# EAGLE board Instructables 36+12 (EAGLE 9.0.1)
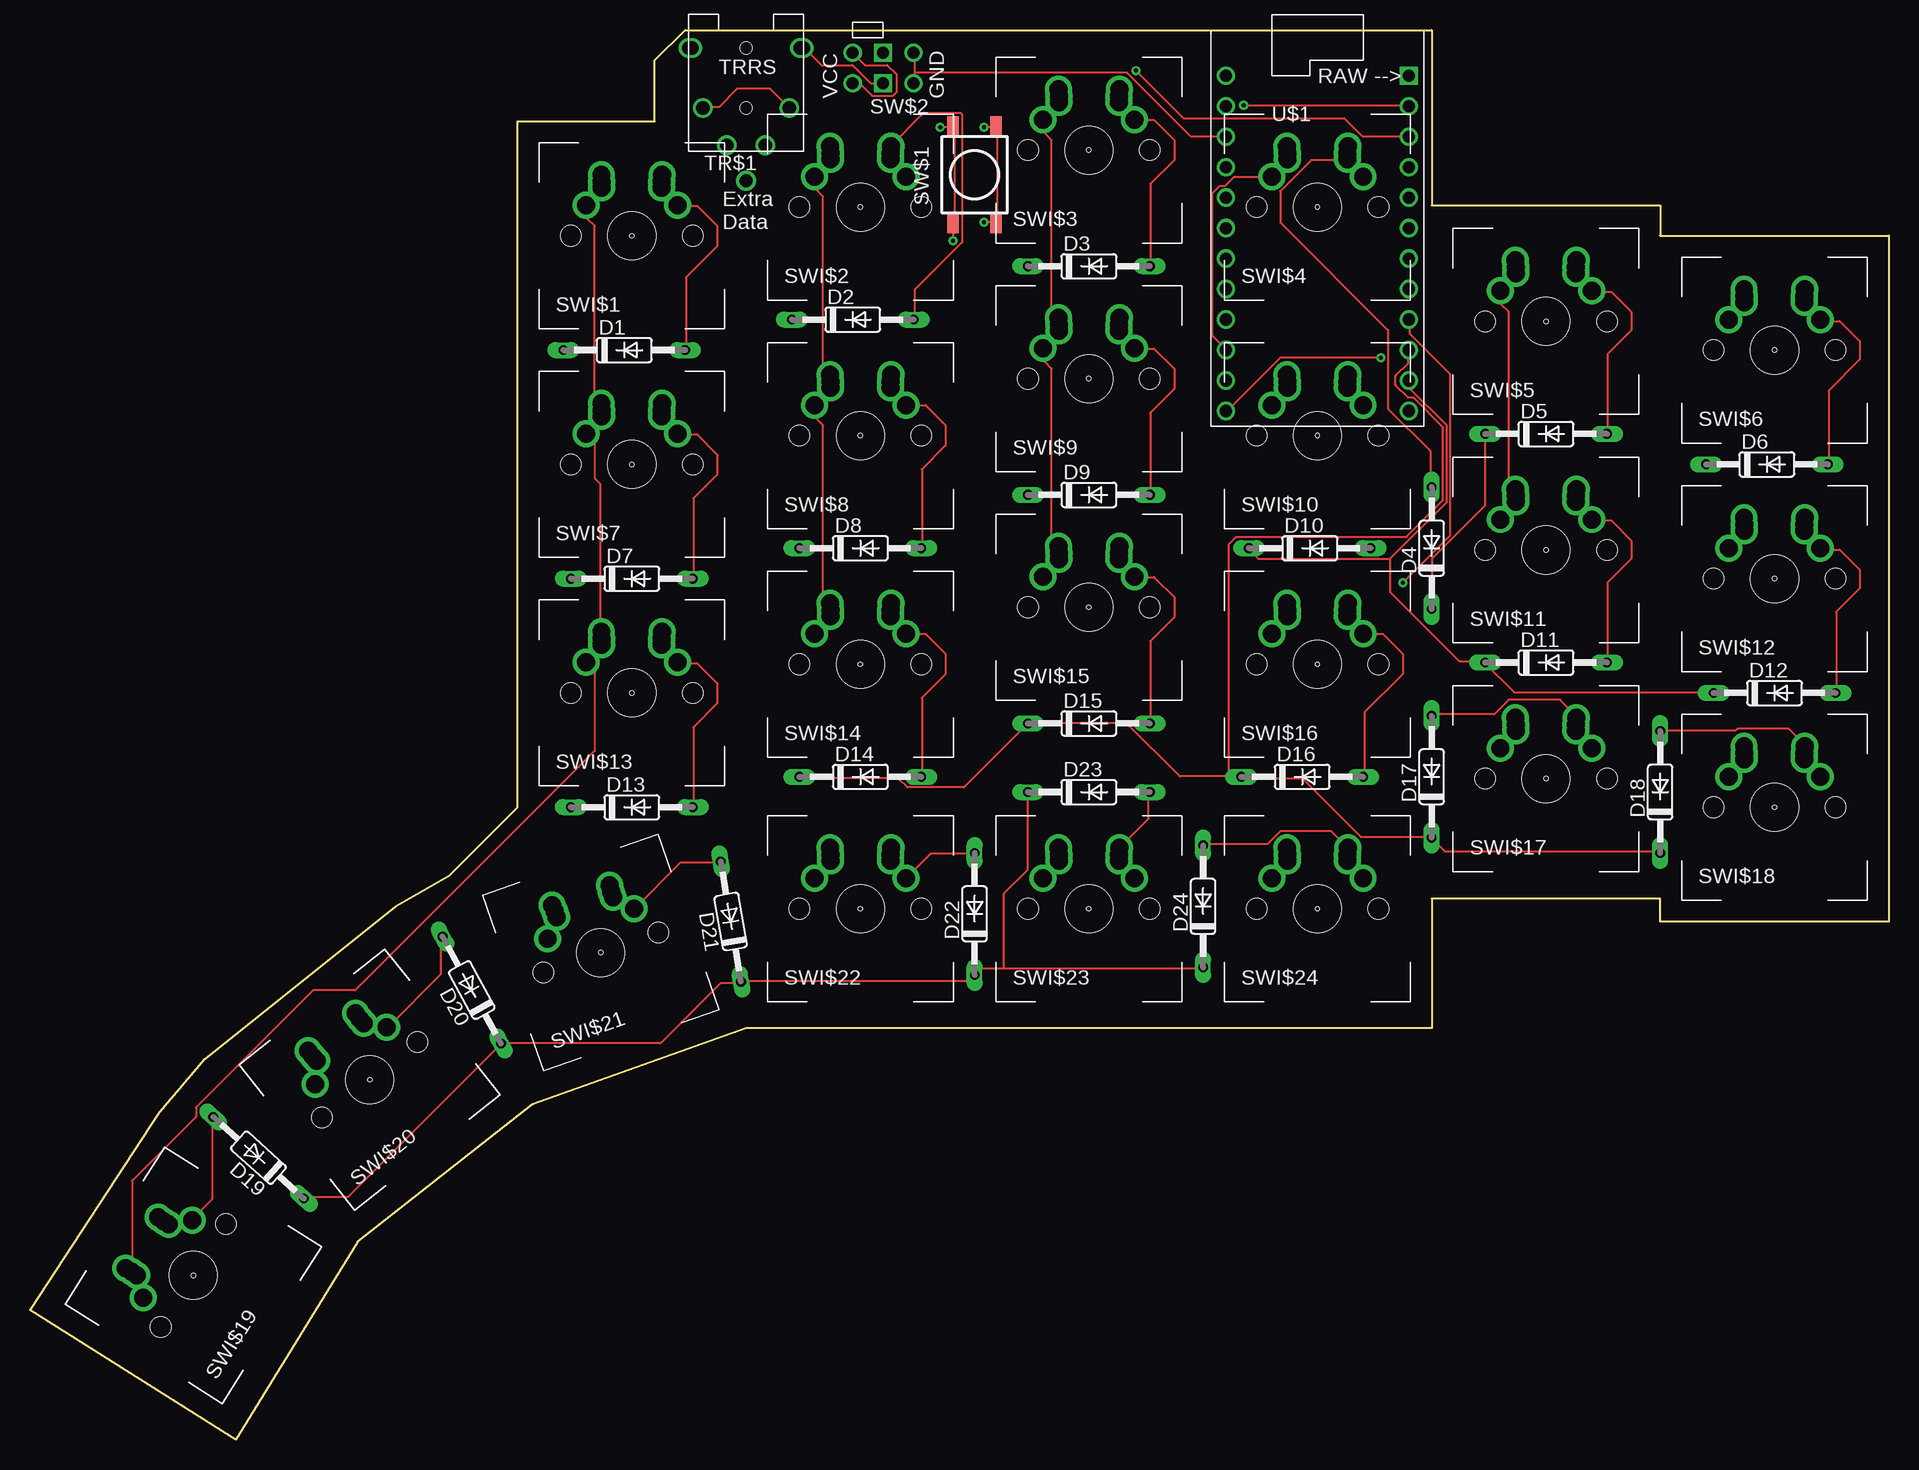
[diagram p0: board, top side]
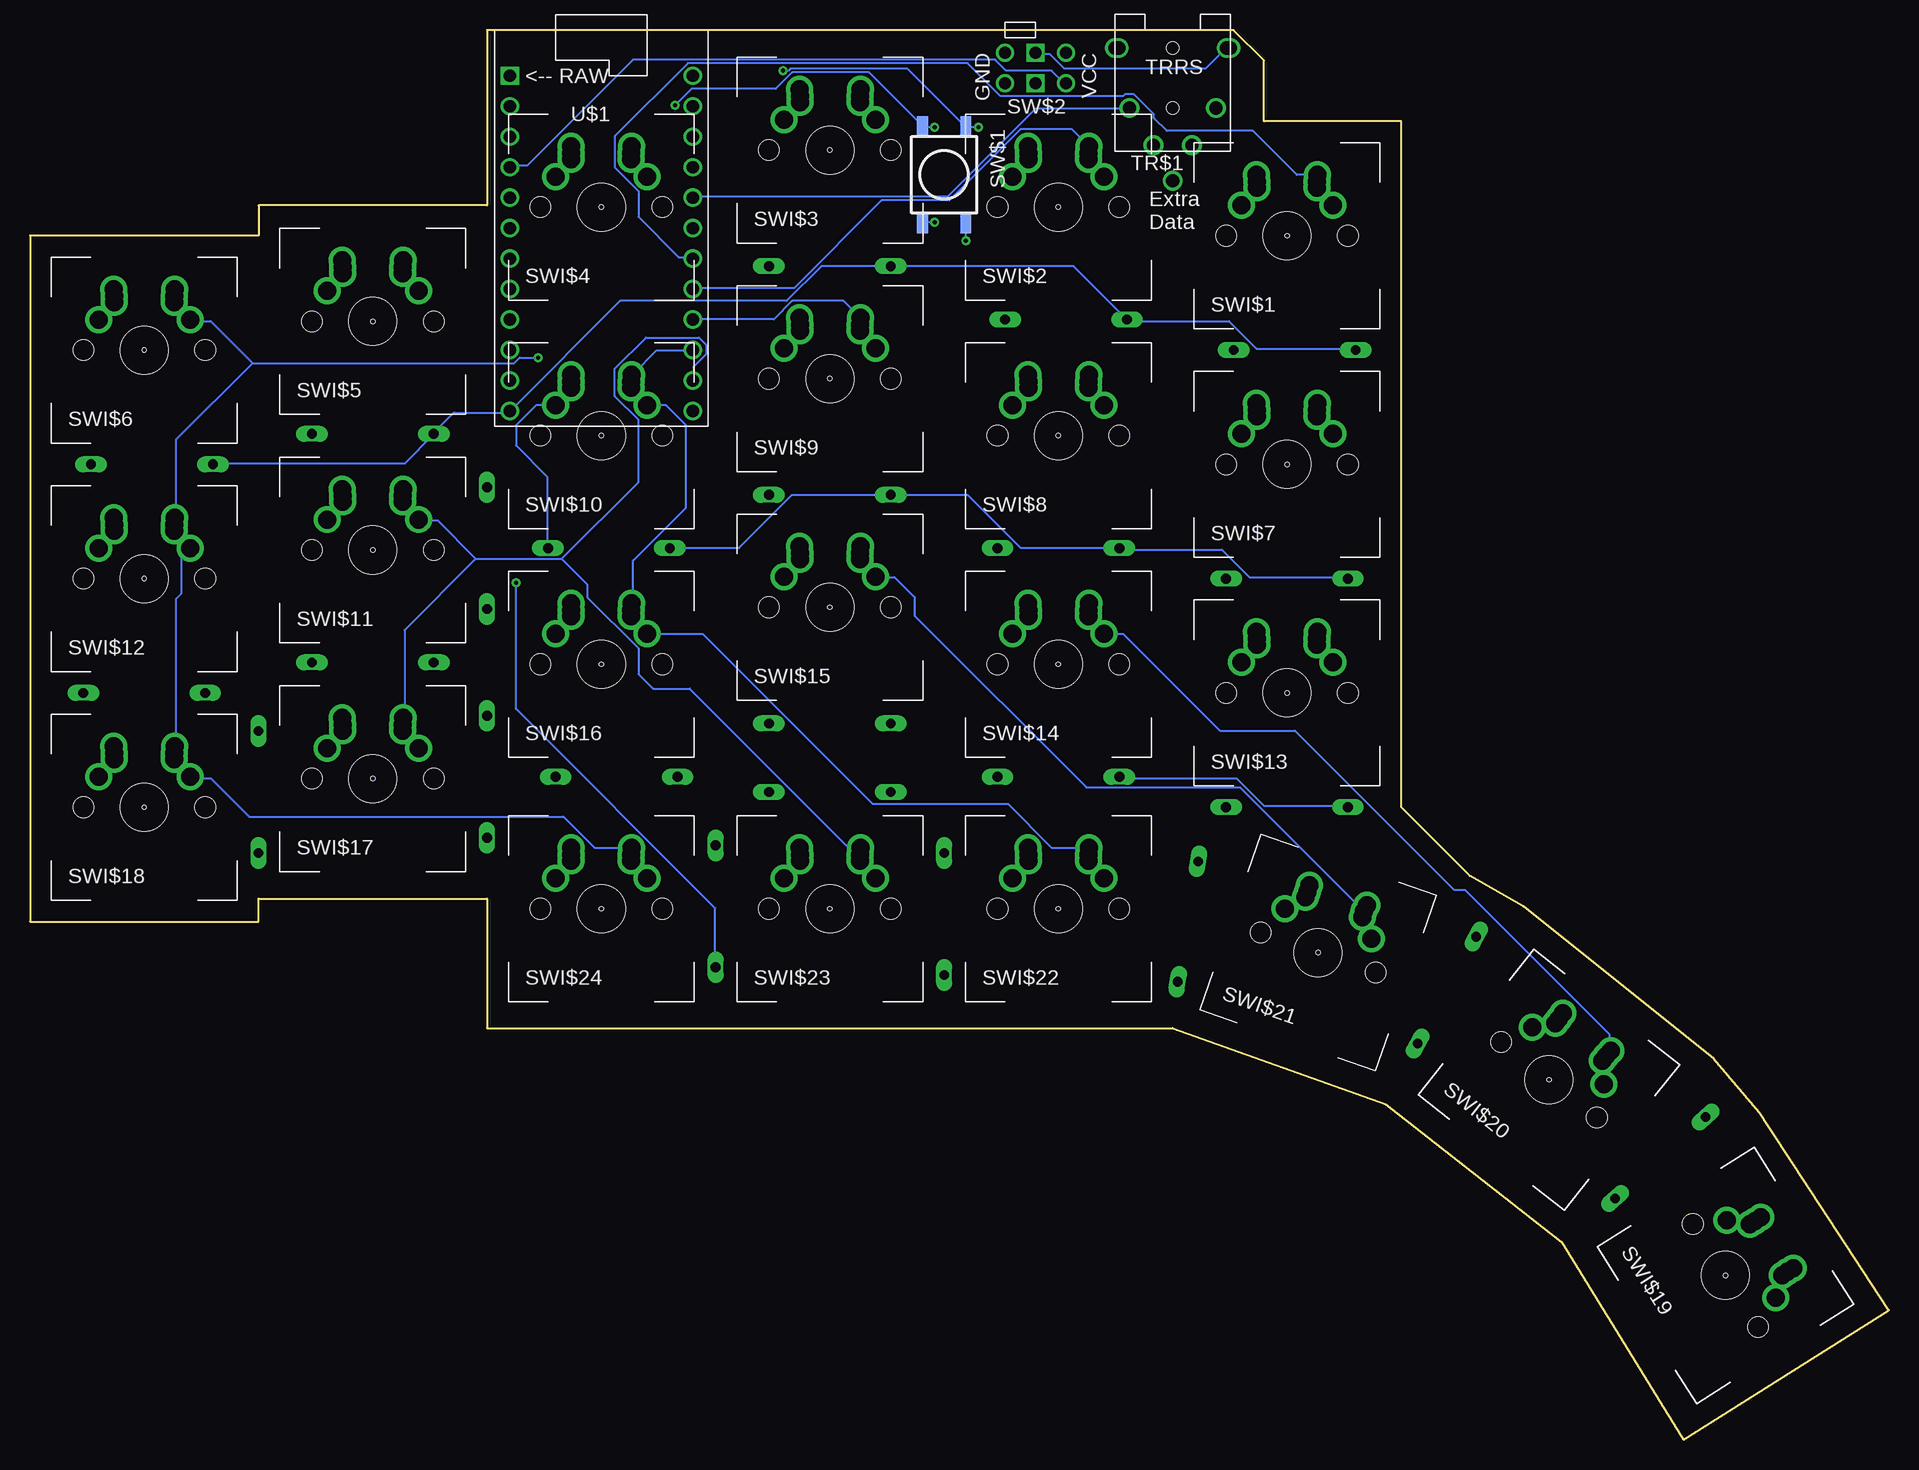
[diagram p1: board, bottom side, seen from below]

Size 154.94 x 117.48 mm. Coordinates in mm from the lower left corner, seen from the top.
Outline: 0,10.79 10.79,27.3 14.61,31.75 30.48,44.45 34.93,46.99 40.64,52.7 40.64,109.86 52.07,109.86 52.07,114.94 54.61,117.48 116.84,117.48 116.84,102.87 135.89,102.87 135.89,100.33 154.94,100.33 154.94,43.18 135.89,43.18 135.89,45.08 116.84,45.08 116.84,34.29 59.69,34.29 41.91,27.94 27.3,16.51 17.14,0 0,10.79
Copper layers (1*16): Top 0.035mm / dielectric 1.5mm / Bottom 0.035mm
Design rules "default": minimum track width 6mil, minimum drill 0.35mm, track to track 6mil, track to pad 6mil, pad to pad 6mil, via to via 6mil, smd to smd 6mil, copper to edge 40mil, drill to drill 6mil, minimum pad ring 10mil, minimum via ring 8mil, stop-mask expansion 4mil, vias tented up to drill 0mil, thermal gap 10mil

## Footprints (pad centres in the part's own frame; a part is rotated, then mirrored left to right if it is on the bottom)
DO35-10 = drill 0.813 long: A 5.08,0; C -5.08,0
FLATSWT = smd 1.778 x 0.914: P$1 -4,-1.8; P$2 4,-1.8; P$3 -4,1.8; P$4 4,1.8 | smd 1.778 x 0.914 bottom: P$5 -4,-1.8; P$6 4,-1.8; P$7 -4,1.8; P$8 4,1.8
TRANSFER = drill 1: GND1 0,-5.08; GND2 2.54,-5.08; VCC1 0,0; VCC2 2.54,0 | drill 1 square: IN1 0,-2.54; IN4 2.54,-2.54
DOUBLED_MX/ALPS = drill 1.5: LAL -2.5,4; LAR -2.5,4.5; RAL 2.5,4; RAR 2.5,4.5 | drill 1.499: LCL -3.81,2.54; LCR -2.54,5.08; RCL 3.81,2.54; RCR 2.54,5.08 | hole 0.35: 0,0 | hole 3.988: 0,0 | hole 1.702: -5.08,0; 5.08,0
TRRSJACK = drill 1.1: 1B 4.5,-1.5; 1T 4.8,-1.5; 2B 3.6,-6.5; 2T -3.6,-6.5; 3B -1.6,-9.6; 3T 1.6,-9.6; 4B -4.8,-1.5; 4T -4.5,-1.5; EXTRA_DATA 0,-12.57 | hole 1: 0,-1.5; 0,-6.5
PROMICRO_UNDER = drill 1.016: P$1 -7.62,0; P$2 -7.62,-2.54; P$3 -7.62,-5.08; P$4 -7.62,-7.62; P$5 -7.62,-10.16; P$6 -7.62,-12.7; P$7 -7.62,-15.24; P$8 -7.62,-17.78; P$9 -7.62,-20.32; P$10 -7.62,-22.86; P$11 -7.62,-25.4; P$12 -7.62,-27.94; P$13 7.62,-27.94; P$14 7.62,-25.4; P$15 7.62,-22.86; P$16 7.62,-20.32; P$17 7.62,-17.78; P$18 7.62,-15.24; P$19 7.62,-12.7; P$20 7.62,-10.16; P$21 7.62,-7.62; P$22 7.62,-5.08; P$23 7.62,-2.54 | drill 1.016 square: P$24 7.62,0

## Placement (x,y rotation side)
D1  1N4148DO35-10  [DO35-10]  49.53,90.81 0 top
D2  1N4148DO35-10  [DO35-10]  68.58,93.34 0 top
D3  1N4148DO35-10  [DO35-10]  88.27,97.79 0 top
D4  1N4148DO35-10  [DO35-10]  116.84,74.3 90 top
D5  1N4148DO35-10  [DO35-10]  126.36,83.82 0 top
D6  1N4148DO35-10  [DO35-10]  144.78,81.28 0 top
D7  1N4148DO35-10  [DO35-10]  50.16,71.76 0 top
D8  1N4148DO35-10  [DO35-10]  69.21,74.3 0 top
D9  1N4148DO35-10  [DO35-10]  88.27,78.74 0 top
D10  1N4148DO35-10  [DO35-10]  106.68,74.3 0 top
D11  1N4148DO35-10  [DO35-10]  126.36,64.77 0 top
D12  1N4148DO35-10  [DO35-10]  145.42,62.23 0 top
D13  1N4148DO35-10  [DO35-10]  50.16,52.7 0 top
D14  1N4148DO35-10  [DO35-10]  69.21,55.24 0 top
D15  1N4148DO35-10  [DO35-10]  88.27,59.69 0 top
D16  1N4148DO35-10  [DO35-10]  106.05,55.24 0 top
D17  1N4148DO35-10  [DO35-10]  116.84,55.24 90 top
D18  1N4148DO35-10  [DO35-10]  135.89,53.97 90 top
D19  1N4148DO35-10  [DO35-10]  19.05,23.5 138 top
D20  1N4148DO35-10  [DO35-10]  36.83,37.46 118.7 top
D21  1N4148DO35-10  [DO35-10]  58.42,43.18 99.6 top
D22  1N4148DO35-10  [DO35-10]  78.74,43.81 90 top
D23  1N4148DO35-10  [DO35-10]  88.27,53.97 0 top
D24  1N4148DO35-10  [DO35-10]  97.79,44.45 90 top
SW$1  RSTSWSMD  [FLATSWT]  78.74,105.41 90 top
SW$2  TRANSFERHOLEY  [TRANSFER]  68.58,113.03 90 top
SWI$1  MX/ALPSDOUBLESIDED  [DOUBLED_MX/ALPS]  50.16,100.33 0 top
SWI$2  MX/ALPSDOUBLESIDED  [DOUBLED_MX/ALPS]  69.21,102.72 0 top
SWI$3  MX/ALPSDOUBLESIDED  [DOUBLED_MX/ALPS]  88.27,107.47 0 top
SWI$4  MX/ALPSDOUBLESIDED  [DOUBLED_MX/ALPS]  107.31,102.72 0 top
SWI$5  MX/ALPSDOUBLESIDED  [DOUBLED_MX/ALPS]  126.36,93.19 0 top
SWI$6  MX/ALPSDOUBLESIDED  [DOUBLED_MX/ALPS]  145.42,90.81 0 top
SWI$7  MX/ALPSDOUBLESIDED  [DOUBLED_MX/ALPS]  50.16,81.28 0 top
SWI$8  MX/ALPSDOUBLESIDED  [DOUBLED_MX/ALPS]  69.21,83.67 0 top
SWI$9  MX/ALPSDOUBLESIDED  [DOUBLED_MX/ALPS]  88.27,88.42 0 top
SWI$10  MX/ALPSDOUBLESIDED  [DOUBLED_MX/ALPS]  107.31,83.67 0 top
SWI$11  MX/ALPSDOUBLESIDED  [DOUBLED_MX/ALPS]  126.36,74.14 0 top
SWI$12  MX/ALPSDOUBLESIDED  [DOUBLED_MX/ALPS]  145.42,71.76 0 top
SWI$13  MX/ALPSDOUBLESIDED  [DOUBLED_MX/ALPS]  50.16,62.23 0 top
SWI$14  MX/ALPSDOUBLESIDED  [DOUBLED_MX/ALPS]  69.21,64.62 0 top
SWI$15  MX/ALPSDOUBLESIDED  [DOUBLED_MX/ALPS]  88.27,69.37 0 top
SWI$16  MX/ALPSDOUBLESIDED  [DOUBLED_MX/ALPS]  107.31,64.62 0 top
SWI$17  MX/ALPSDOUBLESIDED  [DOUBLED_MX/ALPS]  126.36,55.09 0 top
SWI$18  MX/ALPSDOUBLESIDED  [DOUBLED_MX/ALPS]  145.42,52.7 0 top
SWI$19  MX/ALPSDOUBLESIDED  [DOUBLED_MX/ALPS]  13.61,13.69 57.6 top
SWI$20  MX/ALPSDOUBLESIDED  [DOUBLED_MX/ALPS]  28.32,30 38.4 top
SWI$21  MX/ALPSDOUBLESIDED  [DOUBLED_MX/ALPS]  47.57,40.59 19.2 top
SWI$22  MX/ALPSDOUBLESIDED  [DOUBLED_MX/ALPS]  69.21,44.25 0 top
SWI$23  MX/ALPSDOUBLESIDED  [DOUBLED_MX/ALPS]  88.27,44.25 0 top
SWI$24  MX/ALPSDOUBLESIDED  [DOUBLED_MX/ALPS]  107.31,44.25 0 top
TR$1  TRRSJACK  [TRRSJACK]  59.69,117.48 0 top
U$1  PROMICROUNDER  [PROMICRO_UNDER]  107.31,113.67 0 top

## Library data of the parts
D1-D24 = diode
SW$1 SW$2 SWI$1-SWI$24 TR$1 U$1 = Keys

## Nets
N$1: D13.A SWI$13.RAL SWI$13.RAR SWI$13.RCL SWI$13.RCR
N$2: D1.A SWI$1.RAL SWI$1.RAR SWI$1.RCL SWI$1.RCR
N$3: D2.A SWI$2.RAL SWI$2.RAR SWI$2.RCL SWI$2.RCR
N$4: D3.A SWI$3.RAL SWI$3.RAR SWI$3.RCL SWI$3.RCR
N$5: D4.A SWI$4.RAL SWI$4.RAR SWI$4.RCL SWI$4.RCR
N$6: D5.A SWI$5.RAL SWI$5.RAR SWI$5.RCL SWI$5.RCR
N$7: D6.A SWI$6.RAL SWI$6.RAR SWI$6.RCL SWI$6.RCR
N$8: D7.A SWI$7.RAL SWI$7.RAR SWI$7.RCL SWI$7.RCR
N$9: D8.A SWI$8.RAL SWI$8.RAR SWI$8.RCL SWI$8.RCR
N$10: D9.A SWI$9.RAL SWI$9.RAR SWI$9.RCL SWI$9.RCR
N$11: D10.A SWI$10.RAL SWI$10.RAR SWI$10.RCL SWI$10.RCR
N$12: D11.A SWI$11.RAL SWI$11.RAR SWI$11.RCL SWI$11.RCR
N$13: D12.A SWI$12.RAL SWI$12.RAR SWI$12.RCL SWI$12.RCR
N$14: D14.A SWI$14.RAL SWI$14.RAR SWI$14.RCL SWI$14.RCR
N$15: D15.A SWI$15.RAL SWI$15.RAR SWI$15.RCL SWI$15.RCR
N$16: D16.A SWI$16.RAL SWI$16.RAR SWI$16.RCL SWI$16.RCR
N$17: D17.A SWI$17.RAL SWI$17.RAR SWI$17.RCL SWI$17.RCR
N$18: D18.A SWI$18.RAL SWI$18.RAR SWI$18.RCL SWI$18.RCR
N$19: D19.A SWI$19.RAL SWI$19.RAR SWI$19.RCL SWI$19.RCR
N$20: D20.A SWI$20.RAL SWI$20.RAR SWI$20.RCL SWI$20.RCR
N$21: D21.A SWI$21.RAL SWI$21.RAR SWI$21.RCL SWI$21.RCR
N$22: D22.A SWI$22.RAL SWI$22.RAR SWI$22.RCL SWI$22.RCR
N$23: D23.A SWI$23.RAL SWI$23.RAR SWI$23.RCL SWI$23.RCR
N$24: D24.A SWI$24.RAL SWI$24.RAR SWI$24.RCL SWI$24.RCR
N$25: D1.C D2.C D3.C D4.C D5.C D6.C U$1.P$13
N$26: D7.C D8.C D9.C D10.C D11.C D12.C U$1.P$14
N$27: D13.C D14.C D15.C D16.C D17.C D18.C U$1.P$15
N$28: D19.C D20.C D21.C D22.C D23.C D24.C U$1.P$16
N$29: SWI$1.LAL SWI$1.LAR SWI$1.LCL SWI$1.LCR SWI$7.LAL SWI$7.LAR SWI$7.LCL SWI$7.LCR SWI$13.LAL SWI$13.LAR SWI$13.LCL SWI$13.LCR SWI$19.LAL SWI$19.LAR SWI$19.LCL SWI$19.LCR U$1.P$7
N$30: SWI$2.LAL SWI$2.LAR SWI$2.LCL SWI$2.LCR SWI$8.LAL SWI$8.LAR SWI$8.LCL SWI$8.LCR SWI$14.LAL SWI$14.LAR SWI$14.LCL SWI$14.LCR SWI$20.LAL SWI$20.LAR SWI$20.LCL SWI$20.LCR U$1.P$8
N$31: SWI$3.LAL SWI$3.LAR SWI$3.LCL SWI$3.LCR SWI$9.LAL SWI$9.LAR SWI$9.LCL SWI$9.LCR SWI$15.LAL SWI$15.LAR SWI$15.LCL SWI$15.LCR SWI$21.LAL SWI$21.LAR SWI$21.LCL SWI$21.LCR U$1.P$9
N$32: SWI$4.LAL SWI$4.LAR SWI$4.LCL SWI$4.LCR SWI$10.LAL SWI$10.LAR SWI$10.LCL SWI$10.LCR SWI$16.LAL SWI$16.LAR SWI$16.LCL SWI$16.LCR SWI$22.LAL SWI$22.LAR SWI$22.LCL SWI$22.LCR U$1.P$10
N$33: SWI$5.LAL SWI$5.LAR SWI$5.LCL SWI$5.LCR SWI$11.LAL SWI$11.LAR SWI$11.LCL SWI$11.LCR SWI$17.LAL SWI$17.LAR SWI$17.LCL SWI$17.LCR SWI$23.LAL SWI$23.LAR SWI$23.LCL SWI$23.LCR U$1.P$11
N$34: SWI$6.LAL SWI$6.LAR SWI$6.LCL SWI$6.LCR SWI$12.LAL SWI$12.LAR SWI$12.LCL SWI$12.LCR SWI$18.LAL SWI$18.LAR SWI$18.LCL SWI$18.LCR SWI$24.LAL SWI$24.LAR SWI$24.LCL SWI$24.LCR U$1.P$12
N$35: SW$1.P$1 SW$1.P$2 SW$1.P$5 SW$1.P$6 U$1.P$23
N$36: SW$1.P$3 SW$1.P$4 SW$1.P$7 SW$1.P$8 U$1.P$22
N$37: SW$2.GND1 SW$2.GND2 U$1.P$3
N$38: SW$2.VCC1 SW$2.VCC2 U$1.P$21
N$39: SW$2.IN1 TR$1.1B TR$1.1T
N$40: SW$2.IN4 TR$1.4B TR$1.4T
N$41: TR$1.2B TR$1.2T U$1.P$5

## Tracks (layer width: path | path; a pad name or v marks a point on that pad's centre or on a via)
N$1
  Top 0.152: D13.A 55.3,52.83 55.3,59.38 57.28,61.37 57.28,63.04 55.6,64.72 54.08,64.72 SWI$13.RCL
N$2
  Top 0.152: D1.A 54.69,90.93 54.69,96.88 57.28,99.47 57.28,101.14 55.6,102.82 54.08,102.82 SWI$1.RCL
N$3
  Top 0.152: D2.A 73.74,93.37 73.74,95.81 77.7,99.77 77.7,110.44 77.55,110.59 74.5,110.59 71.75,107.85 SWI$2.RCR
N$4
  Top 0.152: D3.A 93.4,97.79 93.4,104.65 95.38,106.63 95.38,108.31 93.7,109.98 92.18,109.98 SWI$3.RCL
N$5
  Top 0.152: D4.A 116.71,79.5 116.71,82.4 113.21,85.9 113.21,92.46 104.22,101.45 104.22,104.04 106.81,106.63 109.7,106.63 SWI$4.RAL
N$6
  Top 0.152: D5.A 131.5,83.92 131.5,90.48 133.48,92.46 133.48,93.98 131.8,95.66 130.28,95.66 SWI$5.RCL
N$7
  Top 0.152: D6.A 149.94,81.33 149.94,87.43 152.53,90.02 152.53,91.54 150.85,93.22 149.33,93.22 SWI$6.RCL
N$8
  Top 0.152: D7.A 55.3,71.88 55.3,78.44 57.28,80.42 57.28,82.09 55.6,83.77 54.08,83.77 SWI$7.RCL
N$9
  Top 0.152: SWI$8.RCL 74.65,86.21 76.33,84.53 76.33,82.86 74.35,80.87 74.35,74.32 D8.A
N$10
  Top 0.152: D9.A 93.4,78.74 93.4,85.6 95.38,87.58 95.38,89.26 93.7,90.93 92.18,90.93 SWI$9.RCL
N$11
  Bottom 0.152: SWI$10.RCL 112.75,86.21 114.43,84.53 114.43,82.86 111.84,80.26 111.84,74.32 D10.A
N$12
  Top 0.152: D11.A 131.5,64.87 131.5,71.42 133.48,73.41 133.48,74.93 131.8,76.61 130.28,76.61 SWI$11.RCL
N$13
  Top 0.152: D12.A 150.55,62.28 150.55,68.99 152.53,70.97 152.53,72.49 150.85,74.17 149.33,74.17 SWI$12.RCL
N$14
  Top 0.152: SWI$14.RCL 74.65,67.16 76.33,65.48 76.33,63.8 74.35,61.82 74.35,55.27 D14.A
N$15
  Top 0.152: D15.A 93.4,59.69 93.4,66.55 95.38,68.53 95.38,70.21 93.7,71.88 92.18,71.88 SWI$15.RCL
N$16
  Top 0.152: SWI$16.RCL 112.75,67.16 114.43,65.48 114.43,63.8 111.23,60.6 111.23,55.27 D16.A
N$17
  Top 0.152: D17.A 116.86,60.45 122.05,60.45 123.27,61.67 127.53,61.67 128.91,60.3 SWI$17.RAR
N$18
  Top 0.152: D18.A 135.92,59.08 142.16,59.08 142.32,59.23 146.58,59.23 147.96,57.86 SWI$18.RAR
N$19
  Top 0.152: D19.A 15.21,26.77 15.21,20.07 13.54,18.39 SWI$19.RCL
N$20
  Top 0.152: D20.A 34.27,41.86 34.27,38.81 29.84,34.39 SWI$20.RCL
N$21
  Top 0.152: D21.A 57.43,48.11 54.23,48.11 50.42,44.3 SWI$21.RCL
N$22
  Top 0.152: SWI$22.RCL 75.11,48.87 78.61,48.87 D22.A
N$23
  Top 0.152: D23.A 93.24,53.9 93.24,51.76 SWI$23.RCR SWI$23.RAL
N$24
  Top 0.152: SWI$24.RCR 108.48,50.7 104.22,50.7 103.15,49.63 97.81,49.63 D24.A
N$25
  Top 0.152: D5.C 121.28,77.83 116.86,73.41 116.86,69.29 D4.C
  Bottom 0.152: D6.C 139.57,81.33 123.72,81.33 121.28,83.77 D5.C 121.28,83.92 119.61,85.6 115.04,85.6 U$1.P$13 114.88,85.75 105.74,94.89 91.87,94.89 88.98,97.79 D3.C 67.94,97.79 D2.C 63.37,93.22 54.99,93.22 52.71,90.93 44.48,90.93 D1.C
N$26
  Top 0.152: D12.C 140.34,62.28 123.72,62.28 121.28,64.72 D11.C 121.28,64.87 119.15,64.87 113.36,70.66 113.36,73.41 | 113.36,73.41 118.08,78.13 118.08,84.53 115.04,87.58 115.04,88.19 U$1.P$14 | 113.36,73.41 102.39,73.41 101.62,74.17 D10.C
  Bottom 0.152: D7.C 45.09,71.88 53.32,71.88 55.6,74.17 64.13,74.17 D8.C 64.13,74.32 72.36,74.32 76.78,78.74 D9.C 91.41,78.74 95.83,74.32 101.47,74.32 D10.C
N$27
  Top 0.152: 99.95,55.27 100.86,55.27 D16.C | 99.95,55.27 95.83,55.27 91.41,59.69 D15.C 77.85,54.36 73.13,54.36 72.36,55.12 64.13,55.12 D14.C | D16.C 101.02,55.12 106.05,55.12 110.92,50.24 116.71,50.24 D17.C 116.86,50.09 117.93,49.02 135.76,49.02 D18.C | 99.95,55.27 99.95,74.62 100.56,75.23 114.73,75.23 117.78,78.28 117.78,84.38 115.34,86.82 114.88,86.82 113.82,87.88 113.82,88.65 114.88,89.71 114.88,90.78 U$1.P$15 | 99.95,55.27 D16.C
  Bottom 0.152: D13.C 45.09,52.83 52.09,52.83 54.38,55.12 64.13,55.12 D14.C
N$28  (via drill 0.35)
  Top 0.152: D19.C 22.83,20.22 26.49,20.22 39.14,32.87 D20.C 39.29,33.02 52.55,33.02 57.58,38.05 59.26,38.05 D21.C 59.41,38.2 78.16,38.2 78.61,38.66 D22.C 78.77,38.81 79.22,39.27 81.2,39.27 | 81.2,39.27 97.66,39.27 D24.C | D23.C 83.18,47.5 81.2,45.52 81.2,39.27 | v114.43,71.42 118.39,75.39 118.39,88.8 115.04,92.15 115.04,93.22 U$1.P$16
  Bottom 0.152: v114.43,71.42 114.43,60.91 97.81,44.3 97.81,39.42 D24.C
N$29
  Top 0.152: SWI$1.LAR 47.68,104.19 SWI$1.LCL 46.46,102.82 46.46,101.75 47.07,101.14 47.07,86.82 47.52,86.36 SWI$7.LAR 47.68,85.9 | SWI$1.LAL 47.68,104.34 SWI$1.LCR | SWI$19.LCL 9.42,13.21 8.97,13.67 SWI$19.LAL 8.36,14.12 8.05,14.12 SWI$19.LCR 8.51,13.97 SWI$19.LAR 8.51,14.12 8.51,21.59 13.84,26.92 13.84,27.69 23.6,37.44 27.1,37.44 47.07,57.4 47.07,64.11 46.46,64.72 SWI$13.LCL 47.68,66.09 SWI$13.LAR 47.68,66.85 47.68,67.31 SWI$13.LCR 47.68,66.24 SWI$13.LAL 47.52,67.31 47.52,79.65 47.07,80.11 47.07,83.16 46.46,83.77 SWI$7.LCL 47.68,85.14 SWI$7.LAL 47.68,85.9 | 47.68,85.9 47.68,86.36 SWI$7.LCR 47.68,85.9
  Bottom 0.152: 47.68,105.41 49.35,105.41 53.01,109.07 60.17,109.07 61.24,110.13 61.24,110.44 62.92,112.12 63.68,112.12 63.83,111.96 74.04,111.96 76.78,114.71 100.1,114.71 106.2,108.61 106.2,106.02 104.22,104.04 104.22,101.91 100.86,98.55 99.8,98.55 U$1.P$7 | 47.68,105.41 SWI$1.LCR | 47.68,105.41 SWI$1.LAR
N$30
  Top 0.152: 65.51,105.26 65.51,105.56 66.57,106.63 SWI$2.LAR 66.57,107.24 SWI$2.LAL 66.57,106.78 SWI$2.LCR | 65.51,86.21 65.51,86.51 66.57,87.58 SWI$8.LAR 66.73,88.19 66.73,88.65 SWI$8.LCR | SWI$8.LAL 66.57,87.73 SWI$8.LCR | SWI$20.LCR 23.29,32.26 23.44,32.11 SWI$20.LAL | SWI$20.LCL 23.75,29.67 23.75,31.5 SWI$20.LCR | SWI$20.LAR 23.6,31.95 SWI$20.LCR | SWI$14.LCL 65.51,67.16 65.51,67.46 66.57,68.53 SWI$14.LAL 66.73,69.14 | 66.73,69.14 66.73,69.6 SWI$14.LCR 66.73,69.14 | 66.73,69.14 SWI$14.LAR 66.57,69.75 66.12,70.21 66.12,84.53 65.51,85.14 65.51,86.21 | 65.51,86.21 SWI$8.LCL | 65.51,105.26 65.51,104.19 66.12,103.58 66.12,89.26 66.57,88.8 SWI$8.LCR | 65.51,105.26 SWI$2.LCL
  Bottom 0.152: SWI$2.LCR 68.1,109.22 72.36,109.22 78.31,103.28 83.95,103.28 91.26,95.96 99.64,95.96 U$1.P$8 | SWI$14.LCL 63.83,67.16 55.75,59.08 49.51,59.08 36.25,45.82 35.33,45.82 23.29,33.78 23.29,32.41 SWI$20.LAR
N$31
  Top 0.152: SWI$3.LAL 85.78,111.51 SWI$3.LCR 85.78,112.42 85.78,112.12 SWI$3.LAR 85.78,111.35 84.56,110.13 SWI$3.LCL 84.56,109.98 84.56,108.92 85.17,108.31 85.17,93.98 85.62,93.52 SWI$9.LAR | SWI$9.LAL 85.78,92.3 84.56,91.08 SWI$9.LCL 84.56,90.93 84.56,89.87 85.17,89.26 85.17,74.93 85.62,74.47 SWI$15.LAL 85.78,73.41 SWI$15.LCR 85.78,74.32 85.78,74.02 SWI$15.LAR 85.78,73.25 84.56,72.03 SWI$15.LCL | 43.87,43.54 43.26,42.93 43.26,41.86 SWI$21.LCL | 43.87,43.54 SWI$21.LAR 43.87,44.14 43.56,44.45 SWI$21.LCR 43.87,43.54 | 43.87,43.54 SWI$21.LAL
  Bottom 0.152: 85.78,93.52 87.15,94.89 91.41,94.89 92.94,93.37 99.64,93.37 U$1.P$9 | 85.78,93.52 SWI$9.LCR 85.78,92.91 SWI$9.LAR | 85.78,93.52 SWI$9.LAL | SWI$21.LAL 43.87,44.14 54.08,54.36 66.88,54.36 81.2,68.68 81.2,70.21 82.88,71.88 84.4,71.88 SWI$15.LCL
N$32
  Top 0.152: SWI$4.LAL 104.67,106.78 SWI$4.LCR 104.83,107.7 104.83,107.24 SWI$4.LAR 104.67,106.63 103.61,105.56 103.61,105.26 SWI$4.LCL 100.41,105.26 99.64,104.5 99.19,104.5 98.58,103.89 98.58,92 99.64,90.93 U$1.P$10 | SWI$10.LCL 103.61,86.21 103.61,86.51 104.67,87.58 SWI$10.LAL 104.83,87.73 | 104.83,87.73 104.83,88.04 SWI$10.LAR 104.83,87.73 | 104.83,87.73 SWI$10.LCR | SWI$22.LCL 66.73,48.11 SWI$22.LAR 66.73,48.87 66.73,49.33 SWI$22.LCR 66.73,48.26 SWI$22.LAL | SWI$16.LCL 103.61,67.16 103.61,67.46 104.67,68.53 SWI$16.LAL 104.83,69.14 | 104.83,69.14 104.83,69.6 SWI$16.LCR 104.83,69.14 | 104.83,69.14 SWI$16.LAR
  Bottom 0.152: U$1.P$10 99.8,90.78 102.69,90.78 104.67,88.8 SWI$10.LCR | SWI$16.LCL 98.88,67.16 84.71,52.98 73.43,52.98 69.77,49.33 66.73,49.33 SWI$22.LAL | SWI$10.LCL 101.93,86.21 100.25,84.53 100.25,77.67 104.67,73.25 104.67,69.75 SWI$16.LAR
N$33
  Top 0.152: 123.72,97.18 122.66,96.11 122.66,95.81 SWI$5.LCL 122.66,95.66 122.66,94.59 123.27,93.98 123.27,79.81 123.72,79.35 SWI$11.LAR | 123.72,97.18 SWI$5.LAR 123.88,97.79 123.88,98.25 SWI$5.LCR 123.72,97.18 | 123.72,97.18 SWI$5.LAL | 123.72,59.08 122.66,58.01 122.66,57.71 SWI$17.LCL | 123.72,59.08 SWI$17.LAL 123.72,59.69 SWI$17.LAR | 123.72,59.08 SWI$17.LCR | SWI$23.LCL 85.78,48.11 SWI$23.LAR 85.78,48.87 85.78,49.33 SWI$23.LCR 85.78,48.26 SWI$23.LAL | 123.88,78.74 123.88,79.2 SWI$11.LCR 123.88,78.74 | 123.88,78.74 SWI$11.LAL | 123.88,78.74 SWI$11.LAR | SWI$11.LAR 123.72,78.13 123.72,77.83 122.66,76.76 SWI$11.LCL
  Bottom 0.152: 110.62,73.41 104.22,79.81 104.22,84.99 106.2,86.97 106.2,89.26 103.61,91.85 99.19,91.85 98.58,91.24 98.58,90.48 99.64,89.41 99.64,88.34 U$1.P$11 | 117.78,73.41 110.62,73.41 | 117.78,73.41 120.98,76.61 122.5,76.61 SWI$11.LCL | 110.62,73.41 108.48,71.27 108.48,70.21 104.22,65.94 104.22,63.8 103,62.59 99.95,62.59 86.69,49.33 85.78,49.33 SWI$23.LAL | 117.78,73.41 123.72,67.46 123.72,60.3 SWI$17.LAR
N$34  (via drill 0.35)
  Top 0.152: SWI$24.LCL 104.83,48.11 SWI$24.LAR 104.83,48.87 104.83,49.33 SWI$24.LCR SWI$24.LAL | SWI$18.LCL 141.71,55.27 141.71,55.57 142.77,56.64 SWI$18.LAL 142.93,57.25 | 142.93,57.25 142.93,57.71 SWI$18.LCR 142.93,57.25 | 142.93,57.25 SWI$18.LAR | SWI$12.LCL 141.71,74.32 141.71,74.62 142.77,75.69 SWI$12.LAR 142.93,76.3 142.93,76.76 SWI$12.LCR 142.77,75.84 SWI$12.LAL | 142.93,95.35 142.93,95.81 SWI$6.LCR 142.93,95.35 | 142.93,95.35 SWI$6.LAL | 142.93,95.35 SWI$6.LAR 142.77,94.74 142.77,94.44 141.71,93.37 SWI$6.LCL | v112.6,90.17 104.22,90.17 99.8,85.75 U$1.P$12
  Bottom 0.152: SWI$24.LAL 104.83,49.33 107.87,49.33 110.46,51.92 136.68,51.92 139.88,55.12 141.55,55.12 SWI$18.LCL | v112.6,90.17 114.12,90.17 114.58,89.71 136.37,89.71 | 136.37,89.71 139.88,93.22 141.55,93.22 SWI$6.LCL | 136.37,89.71 142.77,83.31 142.77,76.91 SWI$12.LCR | SWI$18.LAR 142.77,57.86 142.77,70.05 142.32,70.51 142.32,73.56 141.71,74.17 SWI$12.LCL
N$35  (via drill 0.35)
  Top 0.152: v79.53,101.45 80.44,101.45 SW$1.P$5 80.59,101.45 80.59,109.37 SW$1.P$6 80.44,109.37 v79.53,109.37 | v101.17,111.2 114.88,111.2 U$1.P$23
  Bottom 0.152: v79.53,101.45 80.44,101.45 SW$1.P$5 | v79.53,109.37 80.44,109.37 SW$1.P$6 80.59,109.53 85.01,113.94 91.41,113.94 92.79,112.57 99.8,112.57 v101.17,111.2
N$36  (via drill 0.35)
  Top 0.152: v75.87,109.37 76.94,109.37 SW$1.P$8 77.09,109.37 77.09,101.45 SW$1.P$7 76.94,101.3 v76.94,99.92 | v92.18,114.1 96.14,110.13 109.55,110.13 111.07,108.61 114.88,108.61 U$1.P$22
  Bottom 0.152: v75.87,109.37 76.94,109.37 SW$1.P$8 77.09,109.53 81.81,114.25 91.57,114.25 91.72,114.1 v92.18,114.1 | v76.94,99.92 76.94,101.3 SW$1.P$7
N$37
  Top 0.152: 73.74,113.94 73.74,115.47 SW$2.GND2 | 73.74,113.94 73.74,113.03 SW$2.GND1 | 73.74,113.94 91.41,113.94 96.75,108.61 99.64,108.61 U$1.P$3
N$38
  Top 0.152: SW$2.VCC1 69.16,113.03 70.23,111.96 71.91,111.96 72.21,112.27 72.21,113.79 71.45,114.55 69.62,114.55 68.71,115.47 SW$2.VCC2
  Bottom 0.152: U$1.P$21 114.88,106.17 113.51,106.17 104.67,115.01 74.5,115.01 73.58,114.1 69.77,114.1 68.71,113.03 SW$2.VCC1
N$39
  Top 0.152: SW$2.IN1 70.08,113.03 68.55,114.55 65.96,114.55 64.59,115.93 TR$1.1T 64.44,116.08 64.29,116.08 TR$1.1B
N$40
  Top 0.152: TR$1.4B 54.99,116.08 55.14,116.08 TR$1.4T
  Bottom 0.152: SW$2.IN4 70.99,115.47 69.93,115.47 68.71,114.25 56.97,114.25 55.3,115.93 TR$1.4T
N$41
  Top 0.152: TR$1.2T 56.21,111.05 57.43,111.05 58.95,112.57 61.7,112.57 63.22,111.05 TR$1.2B
  Bottom 0.152: U$1.P$5 99.64,103.58 78.46,103.58 71.14,110.9 63.37,110.9 TR$1.2B